# Altium PCB PCB1.PcbDoc
Units mm, origin at the board's own origin, x right, y up, seen from the top; angles counter-clockwise.
Board outline 112.8 x 79.3 mm, 2 copper layers (Top Layer, Bottom Layer); 40 components, 44 nets, 199 pads, 44 vias.
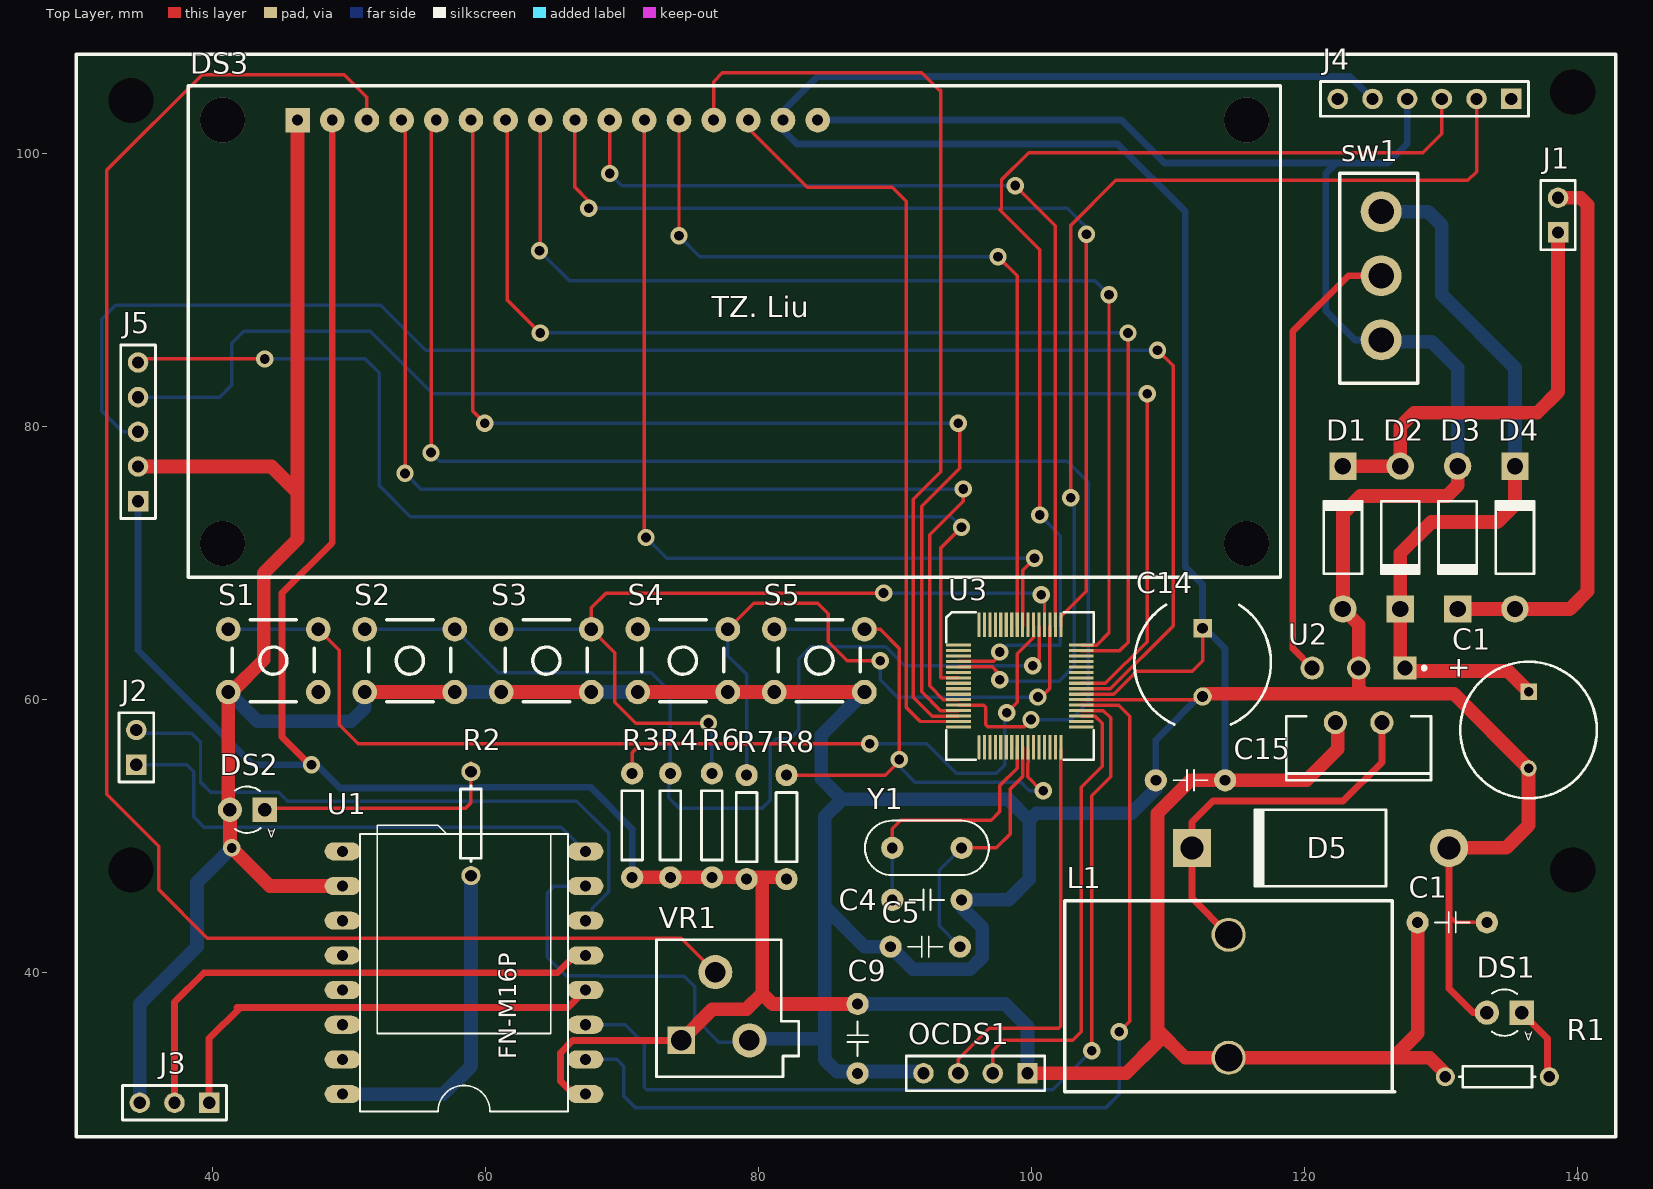
[diagram p0: Top Layer view]
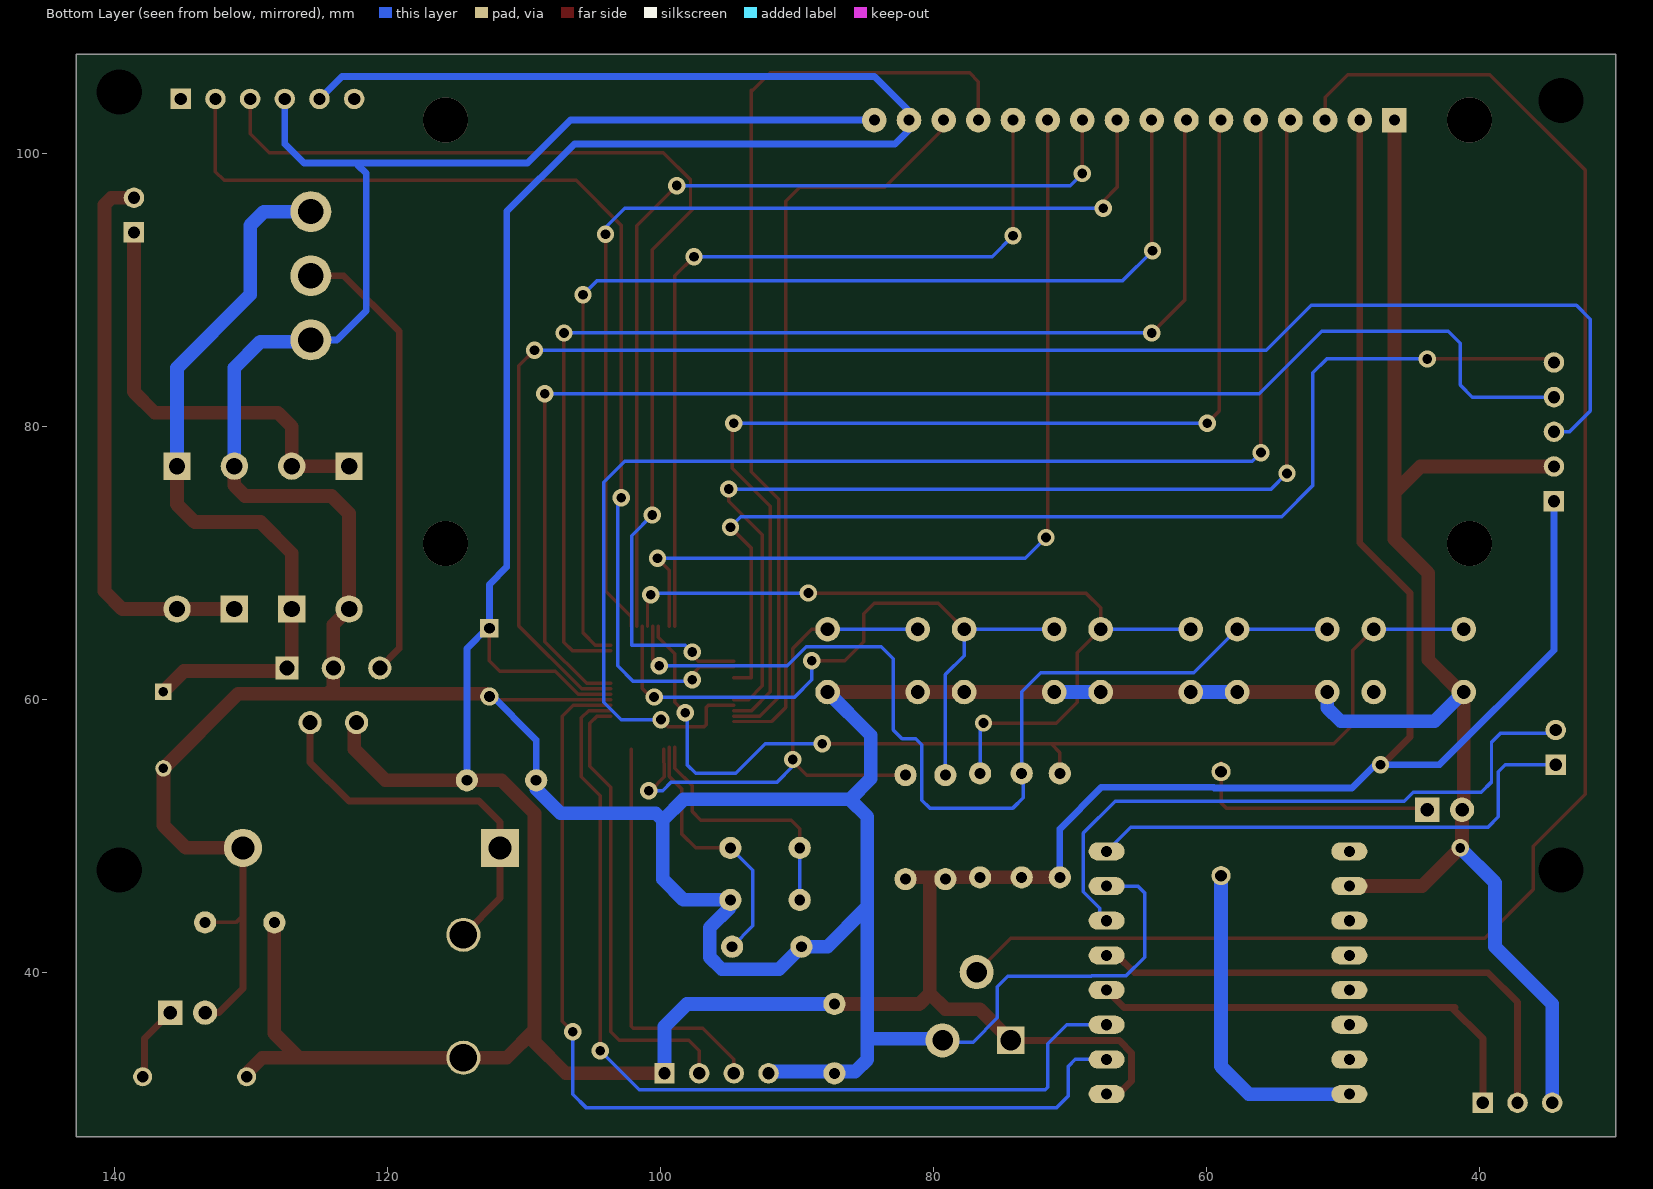
[diagram p1: Bottom Layer view, seen from below]

## Layer stack, top to bottom
Top Layer: signal copper 0.0356
Dielectric: dielectric 0.32, FR-4, Dk 4.8
Bottom Layer: signal copper 0.0356

## Board outline
30,28 30,107.3 142.8,107.3 142.8,28

## Design rules (kind name [scope] priority, off if disabled: settings)
Clearance [All] p1: gap=0.254
DiffPairsRouting [All] p1: maxlimit=0.254 minlimit=0.1 mostfreqgap=0.254 maxuncoupledlength=12.7
PolygonConnect [All] p1: connectstyle=Relief reliefconductorwidth=0.254 reliefentries=4 polygonreliefangle="90 Angle"
RoutingVias [All] p1: holewidth=0.711 width=1.27 viastyle="Through Hole" minholewidth=0.711 minwidth=1.27 maxholewidth=0.711 maxwidth=1.27
SilkscreenOverComponentPads [All] p1: minsilkscreentomaskgap=0.254
SolderMaskExpansion [All] p1: expansion=0.102
Width Width_dc [InNet('DC+')] p1: maxlimit=1.5 minlimit=0.5 preferedwidth=1
Width Width_1 [InNet('GND')] p2: maxlimit=1.5 minlimit=0.254 preferedwidth=1
Width Width_2 [All] p3: maxlimit=1.5 minlimit=0.254 preferedwidth=0.254
26 further rules are at their usual default settings.

## Classes and differential pairs
component class Sheet3: C1 C14 C15 D1 D2 D3 D4 D5 DS1 DS2 DS3 J1 J2 J3 J4 L1 R1 R2 sw1 U1 U2 VR1
component class Sheet4: C1 C4 C5 C9 J5 OCDS1 R3 R4 R6 R7 R8 S1 S2 S3 S4 S5 U3 Y1

## Components (designator, comment, footprint, x,y, rotation, side; value= is the part's Value field where it differs from the comment)
C1 "104" C200 130.81,43.688 r270 top
C1 "Cap Pol1" RB7.6-15 136.398,57.785 r90 top
C4 "22p" C200 92.329,45.339 r270 top
C5 "22p" C200 92.202,41.91 r90 top
C9 "104" C200 87.249,35.179 r180 top
C14 "Cap2" CAPR5-4X5 112.522,62.738 r270 top
C15 "104" C200 111.633,54.102 r90 top
D1 "Diode 1N4001" DO-41 122.8,71.882 r90 top
D2 "Diode 1N4001" DO-41 127,71.882 r270 top
D3 "Diode 1N4001" DO-41 131.2,71.882 r270 top
D4 "Diode 1N4001" DO-41 135.4,71.882 r90 top
D5 "1N5824" DO-201AD 121.158,49.149 r180 top
DS1 "LED" LED-3mm_G 134.62,37.084 r180 top
DS2 "LED" LED-3mm_G 42.545,51.943 r180 top
DS3 "WG14432B" LCM_16 38.227,68.961 r0 top
J1 "AC" HDR1X2 138.557,94.234 r90 top
J2 "speaker" HDR1X2 34.417,55.245 r90 top
J3 "Header 3" HDR1X3 39.751,30.48 r180 top
J4 "HC-05 EXTEND" HDR1X6 135.128,104.013 r180 top
J5 "DS1302" HDR1X5 34.544,74.549 r90 top
L1 "Inductor/80125" T080125 114.427,33.782 r90 top
OCDS1 "Header 4" HDR1X4 99.695,32.639 r180 top
R1 "Res1" AXIAL-0.3#1 134.112,32.385 r180 top
R2 "Res1" AXIAL-0.3#1 58.928,50.927 r270 top
R3 "10k" AXIAL-0.3#2 70.739,50.8 r270 top
R4 "10k" AXIAL-0.3#2 73.533,50.8 r90 top
R6 "10k" AXIAL-0.3#2 76.581,50.8 r90 top
R7 "10k" AXIAL-0.3#2 79.121,50.673 r90 top
R8 "10k" AXIAL-0.3#2 82.042,50.673 r90 top
S1 "SW-PB" TACK6 44.45,62.865 r0 top
S2 "SW-PB" TACK6 54.45,62.865 r0 top
S3 "SW-PB" TACK6 64.45,62.865 r0 top
S4 "SW-PB" TACK6 74.45,62.865 r0 top
S5 "SW-PB" TACK6 84.45,62.865 r0 top
sw1 "sw-ts13" TS-13 125.603,95.758 r270 top
U1 "FN-M16P" FN-M16P 58.42,40.005 r90 top
U2 "LM2596T-5.0" T05D 123.952,60.325 r180 top
U3 "HT66F2390" LFPQ-64 96.139,56.007 r0 top
VR1 "variable resistor" var_test 74.295,35.052 r0 top
Y1 "XTAL" XTAL4-8 92.329,49.149 r0 top

## Footprints (in the part's own frame and the unit in brackets; to place one, negate y for a bottom-side part, rotate by r counter-clockwise, add the part's x,y. Pads: shape width x height; smd on the part's side, far side on the other; paste and mask are expansions set on the pad)
AXIAL-0.3#1 [mm] "Axial Device, Thru-Hole; 2 Leads; 0.3 in Pin Spacing"
  round 1.4 hole 0.85: 1(-3.81,0) 2(3.81,0)
  silkscreen extent -2.77,-0.76 2.77,0.76
AXIAL-0.3#2 [mm] "0.3\" Resistor; 2 Leads"
  round 1.626 hole 0.8: 1(-3.81,0) 2(3.81,0)
  silkscreen extent -2.54,-0.76 2.54,0.76, body extent -4.1,-1 4.19,1, height 2.19
C200 [mil] "鹅?"
  round 64 hole 31.5: 1(0,100) 2(0,-100)
  silkscreen extent -30,-50 30,50, body extent -41,-136 39,135, height 354
CAPR5-4X5 [mm] "Capacitor; 2 Leads"
  rect 1.35x1.35 hole 0.8: 1(-2.5,0)
  round 1.35 hole 0.8: 2(2.5,0)
  silkscreen extent -4.22,-5 4.55,5
DO-41 [mm] "Diode, Axial; Body 5.2 x 2.7 mm (LxDia. max), Lead Dia. 0.86 mm (max)"
  round 2 hole 1.2: 1(-5.23,0)
  rect 2x2 hole 1.2: 2(5.23,0)
  silkscreen extent -2.65,-1.41 2.75,1.4
DO-201AD [mm] "Diode, Axial; Body 9.5 x 5.6 mm (LxDia. max), Lead Dia. 1.32 mm (max)"
  round 2.8 hole 1.7: 1(-9.42,0)
  rect 2.8x2.8 hole 1.7: 2(9.42,0)
  silkscreen extent -4.8,-2.8 4.9,2.8
FN-M16P [mil]
  oval 52x104 hole 32: 1(-350,-350) 2(-250,-350) 3(-150,-350) 4(-50,-350) 5(50,-350) 6(150,-350) 7(250,-350) 8(350,-350) 9(350,350) 10(250,350) 11(150,350) 12(50,350) 13(-50,350) 14(-150,350) 15(-250,350) 16(-350,350)
  silkscreen extent -400,-300 425,300
HDR1X2 [mm] "Connector; Header; 2 Position"
  rect 1.5x1.5 hole 0.9: 1(0,0)
  round 1.5 hole 0.9: 2(2.54,0)
  silkscreen extent -1.27,-1.27 3.81,1.27
HDR1X3 [mm] "Connector; Header; 3 Position"
  rect 1.5x1.5 hole 0.9: 1(0,0)
  round 1.5 hole 0.9: 2(2.54,0) 3(5.08,0)
  silkscreen extent -1.27,-1.27 6.35,1.27
HDR1X4 [mm] "Connector; Header; 4 Position"
  rect 1.5x1.5 hole 0.9: 1(0,0)
  round 1.5 hole 0.9: 2(2.54,0) 3(5.08,0) 4(7.62,0)
  silkscreen extent -1.27,-1.27 8.89,1.27
HDR1X5 [mm] "Connector; Header; 5 Position"
  rect 1.5x1.5 hole 0.9: 1(0,0)
  round 1.5 hole 0.9: 2(2.54,0) 3(5.08,0) 4(7.62,0) 5(10.16,0)
  silkscreen extent -1.27,-1.27 11.43,1.27
HDR1X6 [mm] "Connector; Header; 6 Position"
  rect 1.5x1.5 hole 0.9: 1(0,0)
  round 1.5 hole 0.9: 2(2.54,0) 3(5.08,0) 4(7.62,0) 5(10.16,0) 6(12.7,0)
  silkscreen extent -1.27,-1.27 13.97,1.27
LCM_16 [mm]
  rect 1.8x1.8 hole 0.8: 1(8,33.5)
  round 1.8 hole 0.8: 2(10.54,33.5) 3(13.08,33.5) 4(15.62,33.5) 5(18.16,33.5) 6(20.7,33.5) 7(23.24,33.5) 8(25.78,33.5) 9(28.32,33.5) 10(30.86,33.5) 11(33.4,33.5) 12(35.94,33.5) 13(38.48,33.5) 14(41.02,33.5) 15(43.56,33.5) 16(46.1,33.5)
  silkscreen extent 0,0 80,36, body extent 0.15,-0.03 79.95,36.14, height 12
LED-3mm_G [mil] "3mm LED_Green"
  rect 70x70 hole 39: 1(-50,0)
  round 70 hole 39: 2(50,0)
  silkscreen extent -38,-67 35,67, body extent -66,-68 67,66, height 181
LFPQ-64 [mm]
  oval 0.23x1.8 smd: 1(0,0.5)
  rect 0.23x1.8 smd: 2(0.4,0.5) 3(0.8,0.5) 4(1.2,0.5) 5(1.6,0.5) 6(2,0.5) 7(2.4,0.5) 8(2.8,0.5) 9(3.2,0.5) 10(3.6,0.5) 11(4,0.5) 12(4.4,0.5) 13(4.8,0.5) 14(5.2,0.5) 15(5.6,0.5) 16(6,0.5) 33(6,9.5) 34(5.6,9.5) 35(5.2,9.5) 36(4.8,9.5) 37(4.4,9.5) 38(4,9.5) 39(3.6,9.5) 40(3.2,9.5) 41(2.8,9.5) 42(2.4,9.5) 43(2,9.5) 44(1.6,9.5) 45(1.2,9.5) 46(0.8,9.5) 47(0.4,9.5) 48(0,9.5)
  rect 1.8x0.23 smd: 17(7.5,2) 18(7.5,2.4) 19(7.5,2.8) 20(7.5,3.2) 21(7.5,3.6) 22(7.5,4) 23(7.5,4.4) 24(7.5,4.8) 25(7.5,5.2) 26(7.5,5.6) 27(7.5,6) 28(7.5,6.4) 29(7.5,6.8) 30(7.5,7.2) 31(7.5,7.6) 32(7.5,8) 49(-1.5,8) 50(-1.5,7.6) 51(-1.5,7.2) 52(-1.5,6.8) 53(-1.5,6.4) 54(-1.5,6) 55(-1.5,5.6) 56(-1.5,5.2) 57(-1.5,4.8) 58(-1.5,4.4) 59(-1.5,4) 60(-1.5,3.6) 61(-1.5,3.2) 62(-1.5,2.8) 63(-1.5,2.4) 64(-1.5,2)
  silkscreen extent -2.4,-0.4 8.4,10.4
RB7.6-15 [mm] "Polarized Capacitor (Radial); 2 Leads"
  rect 1.2x1.2 hole 0.7: 1(2.81,0)
  round 1.2 hole 0.7: 2(-2.81,0)
  silkscreen extent -5,-5 5,5
T05D [mm] "TO, Thru-Hole, Vertical, Heatsink Mounted; 5 Bent Staggered Leads; Body 10.3x8.6x4.6mm, Pitch 1.7 mm"
  rect 1.7x1.7 hole 1.1: 1(-3.4,-2)
  round 1.7 hole 1.1: 2(-1.7,2) 3(0,-2) 4(1.7,2) 5(3.4,-2)
  silkscreen extent -5.3,-2.12 5.3,6.23, body extent -5.35,-2.31 5.35,6.28, height 21.1
T080125 [mm]
  round 2.5 hole 2: 1(0,0) 2(9,0)
  silkscreen extent -2.5,-12.15 11.5,12
TACK6 [mm]
  round 1.8 hole 1: 1(-3.3,2.3) 1(3.3,2.3) 2(-3.3,-2.3) 2(3.3,-2.3)
  silkscreen extent -3,-3 3,3, body extent -3,-3.01 3.08,3.04, height 8
TS-13 [mm]
  round 3 hole 1.85: 1(0,0) 2(9.4,0) 3(4.7,0)
  silkscreen extent -2.79,-3.05 12.57,2.67
var_test [mm]
  rect 2x2 hole 1.5: 1(0.033,0)
  round 2.5 hole 1.5: 2(5.033,0) 3(2.533,5)
  silkscreen extent -1.78,-2.67 8.64,7.37
XTAL4-8 [mil]
  round 64 hole 31.5: 1(-100,0) 2(100,0)
  silkscreen extent -179,-79 179,79, body extent -178,-80 192,79, height 157

## Part data
C1 C4 C5 C9 C15: library part Cap, "Capacitor"
C1: "Polarized Capacitor (Radial)"
C14: "Capacitor"
D1 D2 D3 D4: "1 Amp General Purpose Rectifier"
D5: library part "Diode 1N5408", "3 Amp Medium Power Silicon Rectifier Diode"
DS1 DS2: "Typical INFRARED GaAs LED"
DS3: "LCD Module"
J1 J2: library part "Header 2", "Header, 2-Pin"
J3: "Header, 3-Pin"
J4: library part "Header 6", "Header, 6-Pin"
J5: library part "Header 5", "Header, 5-Pin"
L1: library part Inductor, "Inductor"
OCDS1: "Header, 4-Pin"
R1 R2: "Resistor"
R3 R4 R6 R7 R8: library part Res, "Resistor"
S1 S2 S3 S4 S5: "Switch"
U1: "Embedded MP3 Audio Module"
U2: "SIMPLE SWITCHER?Power Converter 150 KHz 3A Step-Down Voltage Regulator, 5-pin TO-220"
Y1: "Crystal Oscillator"

## Free pads (board coordinates)
  round 0 hole 3.3: 0(34.036,103.886) 1(139.636,104.521) 2(139.636,47.521) 3(34.036,47.521)

## Via types
v1: diameter 1.27, hole 0.711, Top Layer to Bottom Layer, 40 vias
v2: diameter 3.3, hole 3.3, Top Layer to Bottom Layer, 4 vias

## Nets (pads, with @x,y where several pads share a name; then routed paths per layer and width w, separated by ;. In a path a pad name is that pad's centre, name@x,y a point inside that pad or via, vN(x,y) a via of type N, cw(c..) or ccw(c..) an arc to the next point about the centre after c; other vN are vias at no path point)
BUSY: R2.2 U1.16 | length 24.2
  Bottom Layer w1: U1.16 56.896,31.115 58.928,33.147 R2.2
DC+: C1.2@128.27,43.688 C9.2 C14.1 C15.2 DS3.2 DS3.15 J4.5 J5.1 L1.1 OCDS1.1 R1.2 R3.2 R4.1 R6.1 R7.1 R8.1 U1.1 U2.4 U3.23 VR1.1 | length 379.4
  Top Layer w0.254: U3.23 106,60.407 107.696,62.103 111.76,62.103 112.522,62.865 C14.1
  Top Layer w0.5: v1@47.117,55.245 45.085,57.277 45.085,67.818 48.767,71.5 DS3.2 ; U1.1 66.454,31.115 65.485,32.084 65.485,34.137 66.378,35.031 74.307,35.031 VR1.1 ; U2.4 U2.4@122.428,58.149
  Top Layer w1: R3.2 R4.1 R6.1 80.264,46.99 ; VR1.1 76.614,37.338 79.121,37.338 80.264,38.481 ; R8.1@82.042,46.99 80.264,46.99 ; C9.2 81.026,37.719 80.264,38.481 ; OCDS1.1 106.934,32.639 109.22,34.925 109.22,35.814 ; U2.4@122.428,58.149 122.428,56.388 120.142,54.102 C15.2 111.633,54.102 109.22,51.689 109.22,35.814 ; C1.2@128.27,43.688 128.27,35.56 126.619,33.909 126.619,33.782 ; R1.2 130.302,32.639 129.159,33.782 126.619,33.782 ; 80.264,38.481 80.264,46.99 ; 109.22,35.814 111.252,33.782 L1.1 126.619,33.782
  Bottom Layer w0.5: J5.1 34.544,63.627 42.926,55.245 v1(47.244,55.245) ; v1@47.752,55.118 49.337,53.533 59.427,53.533 59.488,53.594 67.691,53.594 70.739,50.546 R3.2 ; DS3.15@81.787,101.728 82.804,100.711 106.299,100.711 111.252,95.758 111.252,69.723 112.522,68.453 C14.1 112.689,65.238 114.173,63.754 C15.2 ; DS3.15@81.787,103.123 84.328,105.664 123.317,105.664 J4.5
  Bottom Layer w1: C9.2 98.044,37.719 99.695,36.068 OCDS1.1
GND: C1.1@133.35,43.688 C1.2@136.398,54.975 C4.1 C5.1 C9.1 C14.2 C15.1 D1.1 D3.1 D5.1 DS1.2 DS2.2 DS3.1 DS3.16 J3.3 J4.4 J5.2 OCDS1.4 S1.2@41.15,60.565 S2.2 S3.2 S4.2 S5.2 sw1.2 U1.7 U1.10 U2.3 U3.22 VR1.2 | length 442.6
  Top Layer w0.254: U3.22 C14.2@112.037,60.007 ; 130.578,44.196 131.086,43.688 C1.1@133.35,43.688
  Top Layer w0.5: D5.1 130.578,44.196 130.578,38.84 132.334,37.084 DS1.2
  Top Layer w1: J5.2 44.322,77.089 46.227,75.184 ; DS3.1 46.227,75.184 ; U1.10 44.196,46.355 v1(41.402,49.149) 41.275,49.276 DS2.2 41.15,52.068 41.15,60.565 41.388,60.565 43.752,62.928 43.752,69.278 46.227,71.754 46.227,75.184 ; S2.2@51.15,60.565 S2.2@57.75,60.565 ; S3.2@61.15,60.565 S3.2@67.75,60.565 ; S4.2@71.15,60.565 77.75,60.565 81.15,60.565 S5.2@87.75,60.565 ; C14.2 112.736,60.452 124.333,60.452 ; D5.1 134.747,49.149 136.398,50.8 136.398,54.975 130.921,60.452 124.333,60.452 ; D3.1 131.2,75.701 130.429,74.93 124.079,74.93 122.8,73.651 D1.1 123.952,65.5 U2.3 123.952,60.833 124.333,60.452
  Bottom Layer w0.254: U1.7 65.024,46.355 64.516,45.847 64.516,41.148 65.888,39.776 68.402,39.776 68.427,39.751 74.549,39.751 75.311,38.989 75.311,36.703 77.089,34.925 79.201,34.925 VR1.2
  Bottom Layer w0.5: DS3.16 106.581,102.461 109.728,99.314 122.174,99.314 ; C15.1 109.093,57.063 C14.2@112.522,60.492 ; sw1.2 123.7,86.358 121.539,88.519 121.539,98.552 122.174,99.187 122.174,99.314 ; J4.4 127.508,100.711 126.111,99.314 122.174,99.314
  Bottom Layer w1: J3.3 34.671,37.719 38.862,41.91 38.862,46.609 v1(41.402,49.149) ; S1.2@41.15,60.565 43.295,58.42 50.165,58.42 51.15,59.405 S2.2@51.15,60.565 ; S2.2@57.75,60.565 S3.2@61.15,60.565 ; S3.2@67.75,60.565 S4.2@71.15,60.565 ; VR1.2 79.455,35.179 84.836,35.179 ; S5.2@87.75,60.565 84.582,57.397 84.582,54.229 86.106,52.705 ; OCDS1.4 91.948,32.766 85.725,32.766 84.836,33.655 84.836,35.179 ; C15.1@109.093,53.467 107.315,51.689 100.33,51.689 99.822,51.181 ; sw1.2 125.728,86.233 129.286,86.233 131.2,84.319 D3.1 ; 84.836,35.179 84.836,44.577 ; 84.836,44.577 84.963,44.704 87.757,41.91 C5.1 91.313,40.259 95.504,40.259 96.393,41.148 96.393,43.307 94.869,44.831 C4.1 98.298,45.339 99.822,46.863 99.822,51.181 ; 84.836,44.577 84.836,51.435 86.106,52.705 ; 86.106,52.705 98.298,52.705 99.822,51.181
HTRX0: U1.3 U3.20 | length 69.4
  Top Layer w0.254: U3.20 105.258,59.207 105.791,58.674 105.791,54.356 104.394,52.959 v1(104.394,34.29)
  Bottom Layer w0.254: U1.3 70.231,36.195 71.628,34.798 71.628,31.623 71.806,31.445 101.549,31.445 v1(104.394,34.29)
HTRX1: J4.3 U3.52 | length 80.3
  Top Layer w0.254: U3.52 97.213,62.807 97.663,63.257 v1(97.663,63.5) ; v1(100.584,73.533) 100.584,92.964 97.663,95.885 97.79,96.012 97.79,98.084 99.782,100.076 128.651,100.076 130.048,101.473 J4.3
  Bottom Layer w0.254: v1(97.663,63.5) 98.171,64.008 102.108,64.008 102.108,72.009 v1(100.584,73.533)
HTTX0: U1.2 U3.21 | length 74.2
  Top Layer w0.254: U3.21 106.382,59.607 107.188,58.801 107.188,36.449 v1(106.426,35.687)
  Bottom Layer w0.254: U1.2 69.596,33.655 70.104,33.147 70.104,30.988 70.993,30.099 105.41,30.099 106.426,31.115 v1(106.426,35.687)
HTTX1: J4.2 U3.53 | length 77.7
  Top Layer w0.254: U3.53 97.105,62.407 v1@97.536,61.976 ; v1(102.87,74.803) 102.87,94.742 106.172,98.044 131.953,98.044 132.588,98.679 J4.2
  Bottom Layer w0.254: v1@97.536,61.595 v1(97.663,61.468) ; v1@97.917,61.341 101.981,61.341 103.124,62.484 103.124,74.295 v1@102.87,74.549
KEY: J4.6
NetD1_2: D1.2 D2.1 J1.1 | length 31.4
  Top Layer w1: D1.2 D2.1 127,80.01 128.016,81.026 137.033,81.026 138.557,82.55 J1.1
NetD3_2: D3.2 D4.1 J1.2 | length 40.7
  Top Layer w1: D3.2 D4.1 139.423,66.652 140.716,67.945 140.716,96.266 140.208,96.774 J1.2
NetD5_2: D5.2 L1.2 U2.2 | length 28
  Top Layer w0.5: L1.2 111.738,45.471 D5.2 111.738,51.032 113.284,52.578 122.809,52.578 125.652,55.421 U2.2
NetDS1_1: DS1.1 R1.1 | length 5.5
  Top Layer w0.5: DS1.1 137.795,35.179 137.795,32.512 R1.1
NetDS2_1: DS2.1 R2.1 | length 18.2
  Top Layer w0.254: DS2.1 43.942,52.07 58.547,52.07 58.928,52.451 R2.1@58.928,55.372
NetDS3_3: DS3.3 VR1.3 | length 121.9
  Top Layer w0.254: DS3.3 51.307,104.141 49.657,105.791 39.243,105.791 32.258,98.806 32.258,53.086 36.067,49.277 36.067,46.102 39.624,42.545 74.335,42.545 VR1.3
NetJ2_1: J2.1 U1.8 | length 37.5
  Bottom Layer w0.254: J2.1 38.1,55.245 38.608,54.737 38.608,51.435 39.37,50.673 65.532,50.673 U1.8
NetJ2_2: J2.2 U1.6 | length 46.9
  Bottom Layer w0.254: J2.2 34.671,57.531 38.481,57.531 39.116,56.896 39.116,53.975 39.878,53.213 44.862,53.213 45.497,52.578 66.675,52.578 69.012,50.241 69.012,45.924 67.818,44.73 67.818,43.815 U1.6
NetJ3_1: J3.1 U1.4 | length 34
  Top Layer w0.5: J3.1 39.751,35.179 42.037,37.465 ; 41.783,37.465 42.037,37.465 ; U1.4 66.04,37.465 42.037,37.465
NetJ3_2: J3.2 U1.5 | length 38.9
  Top Layer w0.5: J3.2 37.211,37.846 39.37,40.005 65.278,40.005 66.548,41.275 U1.5
Netsw1_3: sw1.3 U2.5 | length 33.4
  Top Layer w0.5: U2.5 119.126,63.751 119.126,86.995 123.189,91.058 sw1.3
PA0: OCDS1.2 U3.19 | length 33.7
  Top Layer w0.254: OCDS1.2 97.155,34.29 97.917,35.052 102.997,35.052 103.632,35.687 103.632,53.594 105.156,55.118 105.156,58.293 104.642,58.807 U3.19
PA2: OCDS1.3 U3.16 | length 29.8
  Top Layer w0.254: OCDS1.3 94.615,33.655 96.901,35.941 101.981,35.941 102.139,36.099 U3.16@102.139,56.38
PB6: C4.2 U3.8 Y1.1 | length 18.8
  Top Layer w0.254: Y1.1 89.789,50.546 90.424,51.181 97.028,51.181 97.663,51.816 97.663,53.721 98.939,54.997 U3.8
  Bottom Layer w0.254: C4.2 Y1.1
PB7: C5.2 U3.9 Y1.2 | length 19.3
  Top Layer w0.254: Y1.2 97.409,49.149 98.425,50.165 98.425,53.467 99.339,54.381 U3.9
  Bottom Layer w0.254: C5.2 93.218,43.434 93.218,47.498 Y1.2
PD4: DS3.4 U3.59 | length 85.3
  Top Layer w0.254: DS3.4 54.102,102.206 v1(54.102,76.581) ; U3.59 93.536,60.007 92.52,61.023 92.52,72.073 94.996,74.549 v1(94.996,75.438)
  Bottom Layer w0.254: v1(54.102,76.581) 55.246,75.437 v1(94.996,75.438) v1(94.996,75.438)
PD5: DS3.5 U3.60 | length 101.3
  Top Layer w0.254: v1(56.007,78.105) 56.007,102.081 DS3.5 ; U3.60 96.476,59.607 96.647,59.436 96.647,58.166 96.774,58.039 99.441,58.039 v1(99.949,58.547)
  Bottom Layer w0.254: v1(56.007,78.105) 56.642,77.47 102.616,77.47 104.14,75.946 104.14,59.817 102.87,58.547 v1(99.949,58.547)
PD6: DS3.6 U3.61 | length 81.4
  Top Layer w0.254: DS3.6 59.055,102.333 59.055,81.153 v1(59.944,80.264) ; v1(94.615,80.264) 94.742,80.137 94.742,76.962 91.948,74.168 91.948,60.579 93.32,59.207 U3.61
  Bottom Layer w0.254: v1(59.944,80.264) v1(94.615,80.264)
PF0: DS3.7 U3.31 | length 86
  Top Layer w0.254: DS3.7 61.595,102.333 61.595,89.281 v1(64.008,86.868) ; U3.31 106.446,63.607 107.061,64.222 v1(107.061,86.868)
  Bottom Layer w0.254: v1(64.008,86.868) v1(107.061,86.868)
PF1: DS3.8 U3.32 | length 80
  Top Layer w0.254: v1(63.944,92.9) 64.007,92.963 DS3.8 ; U3.32 104.774,64.007 105.664,64.897 v1(105.664,89.662) ; 104.775,64.008 104.902,64.135
  Bottom Layer w0.254: v1(63.944,92.9) 66.167,90.678 104.648,90.678 v1(105.664,89.662)
PF2: DS3.9 U3.33 | length 73.9
  Top Layer w0.254: DS3.9 66.547,97.537 67.564,96.52 v1(67.564,96.012) ; U3.33@102.139,65.38 102.139,66.071 104.013,67.945 v1(104.013,94.107)
  Bottom Layer w0.254: v1(67.564,96.012) 102.616,96.012 104.013,94.615 v1(104.013,94.107)
PF3: DS3.10 U3.34 | length 67.5
  Top Layer w0.254: v1(69.088,98.552) DS3.10 ; v1(98.806,97.663) 101.739,94.73 U3.34@101.739,65.38
  Bottom Layer w0.254: v1(69.088,98.552) 69.977,97.663 v1(98.806,97.663)
PF4: DS3.11 U3.40 | length 64.9
  Top Layer w0.254: v1@71.627,72.01 DS3.11 ; U3.40@99.339,65.38 99.339,69.494 v1(100.203,70.358)
  Bottom Layer w0.254: v1(71.755,71.882) 73.279,70.358 v1(100.203,70.358)
PF5: DS3.12 U3.41 | length 60.1
  Top Layer w0.254: DS3.12 DS3.12 v1(74.168,93.98) ; v1(97.536,92.456) 98.939,91.053 U3.41@98.939,65.38
  Bottom Layer w0.254: v1(74.168,93.98) 75.692,92.456 v1(97.536,92.456)
PF6: DS3.13 U3.62 | length 69.4
  Top Layer w0.254: DS3.13 76.707,105.284 77.341,105.918 91.948,105.918 93.218,104.648 93.345,104.648 93.345,76.708 91.313,74.676 91.313,60.198 92.71,58.801 ; 92.716,58.807 U3.62
PF7: DS3.14 U3.63 | length 55.7
  Top Layer w0.254: DS3.14 79.247,101.855 83.566,97.536 89.789,97.536 90.805,96.52 90.805,59.436 91.821,58.42 ; 91.834,58.407 U3.63
PG0: R3.1 S1.1 U3.38 | length 78.1
  Top Layer w0.254: S1.1@47.75,65.165 49.276,63.639 49.276,58.166 50.673,56.769 71.374,56.769 ; R3.1 70.739,56.134 71.374,56.769 ; v1(88.138,56.769) 71.374,56.769 ; v1(98.171,59.055) 98.933,59.817 98.933,63.373 100.139,64.579 U3.38@100.139,65.38
  Bottom Layer w0.254: S1.1@41.15,65.165 S1.1@47.75,65.165 ; v1(88.138,56.769) 92.329,56.769 94.488,54.61 97.409,54.61 98.044,55.245 v1@98.044,59.055
PG1: R4.2 S2.1 U3.37 | length 73.4
  Top Layer w0.254: v1(100.076,62.484) 100.539,62.947 U3.37@100.539,65.38
  Bottom Layer w0.254: S2.1@51.15,65.165 57.75,65.165 60.939,61.976 72.136,61.976 73.533,60.579 R4.2 73.406,54.483 73.406,52.832 74.168,52.07 80.264,52.07 80.848,52.654 80.848,56.718 81.28,57.15 82.296,57.15 82.931,57.785 82.931,62.992 83.82,63.881 89.321,63.881 90.718,62.484 v1(100.076,62.484) v1@100.33,62.738
PG2: R6.2 S3.1 U3.36 | length 60.9
  Top Layer w0.254: v1(76.327,58.293) 70.993,58.293 69.469,59.817 69.469,63.446 67.75,65.165 67.75,66.734 68.834,67.818 v1(89.154,67.818) ; U3.36@100.939,65.38 U3.36 v1@100.939,67.463
  Bottom Layer w0.254: S3.1@61.15,65.165 S3.1@67.75,65.165 ; v1(76.327,58.293) 76.581,58.039 R6.2 R6.2@76.708,54.737 ; v1(89.154,67.818) v1@100.457,67.818
  other v1: 100.711,67.691
PG3: R7.2 S4.1 U3.35 | length 52.2
  Top Layer w0.254: S4.1@77.75,65.165 79.641,67.056 84.328,67.056 85.09,66.294 85.09,64.262 86.487,62.865 v1(88.9,62.865) ; v1(100.457,60.198) v1@100.457,60.579 ; v1@100.577,60.064 101.339,60.826 U3.35@101.339,65.38
  Bottom Layer w0.254: S4.1@71.15,65.165 77.75,65.165 77.75,63.22 79.121,61.849 R7.2 ; v1(88.9,62.865) 88.9,61.468 90.17,60.198 v1(100.457,60.198)
PG4: R8.2 S5.1 U3.10 | length 42
  Top Layer w0.254: R8.2 89.281,54.483 90.297,55.499 v1(90.297,55.626) 90.297,63.754 88.9,65.151 87.764,65.151 S5.1@87.75,65.165 ; U3.10@99.739,56.38 99.7,54.356 100.716,53.34 v1(100.838,53.34)
  Bottom Layer w0.254: S5.1@81.15,65.165 S5.1@87.75,65.165 ; v1(90.297,55.626) 90.297,55.118 91.44,53.975 99.187,53.975 99.822,53.34 v1(100.838,53.34)
PH0: J5.3 U3.24 | length 118.5
  Top Layer w0.254: U3.24 105.765,60.807 110.363,65.405 110.363,84.455 v1(109.22,85.598)
  Bottom Layer w0.254: J5.3 33.401,79.629 31.877,81.153 31.877,87.884 32.893,88.9 52.324,88.9 55.626,85.598 v1(109.22,85.598)
PH1: J5.4 U3.25 | length 103.8
  Top Layer w0.254: U3.25 105.403,61.207 108.458,64.262 v1(108.458,82.423)
  Bottom Layer w0.254: J5.4 40.513,82.169 41.402,83.058 41.402,86.106 42.291,86.995 51.562,86.995 56.134,82.423 v1(108.458,82.423)
PH2: J5.5 U3.55 | length 83.3
  Top Layer w0.254: J5.5 34.798,84.963 v1(43.815,84.963) ; U3.55 93.333,61.607 93.333,71.12 v1(94.857,72.644)
  Bottom Layer w0.254: v1(43.815,84.963) 51.181,84.963 52.197,83.947 52.197,75.692 54.483,73.406 94.095,73.406 v1(94.857,72.644)
STATE: J4.1
VCC: C1.1@136.398,60.595 D2.2 D4.2 sw1.1 U2.1 | length 55.8
  Top Layer w0.254: U2.1 127.574,62.103 U2.1@127.635,62.042
  Top Layer w1: U2.1 127,62.677 D2.2 127,70.739 129.286,73.025 134.112,73.025 135.4,74.313 D4.2 ; U2.1@127.574,62.103 134.89,62.103 C1.1@136.398,60.595
  Bottom Layer w1: sw1.1 129.032,95.758 130.048,94.742 130.048,89.662 135.4,84.31 D4.2
pads on no net: S1.2@47.75,60.565 U1.9 U1.11 U1.12 U1.13 U1.14 U1.15 U3.1 U3.2 U3.3 U3.4 U3.5 U3.6 U3.7 U3.11 U3.12 U3.13 U3.14 U3.15 U3.17 U3.18 U3.26 U3.27 U3.28 U3.29 U3.30 U3.39 U3.42 U3.43 U3.44 U3.45 U3.46 U3.47 U3.48 U3.49 U3.50 U3.51 U3.54 U3.56 U3.57 U3.58 U3.64
copper on no net:
  other v2: 40.727,71.461 115.727,71.461 40.727,102.461 115.727,102.461

## Silkscreen, mask and mechanical layers (free items; w line width, h text height)
Top Overlay:
  the board outline again, w0.254
  text "TZ. Liu" at 76.581,88.011 h1.52

## Text inside footprints (layer, text, board x,y; h text height)
C1: Top Overlay "+" at 131.953,61.468 h1.5 r90
DS1: Top Overlay "A" at 136.72,35.684 h0.64 r180
DS2: Top Overlay "A" at 44.645,50.543 h0.64 r180